# Altium PCB SIM800C.PcbDoc
Units mm, origin at the board's own origin, x right, y up, seen from the top; angles counter-clockwise.
Board outline 30.18 x 25.59 mm, 2 copper layers (TopLayer, BottomLayer); 27 components, 29 nets, 123 pads, 34 vias.
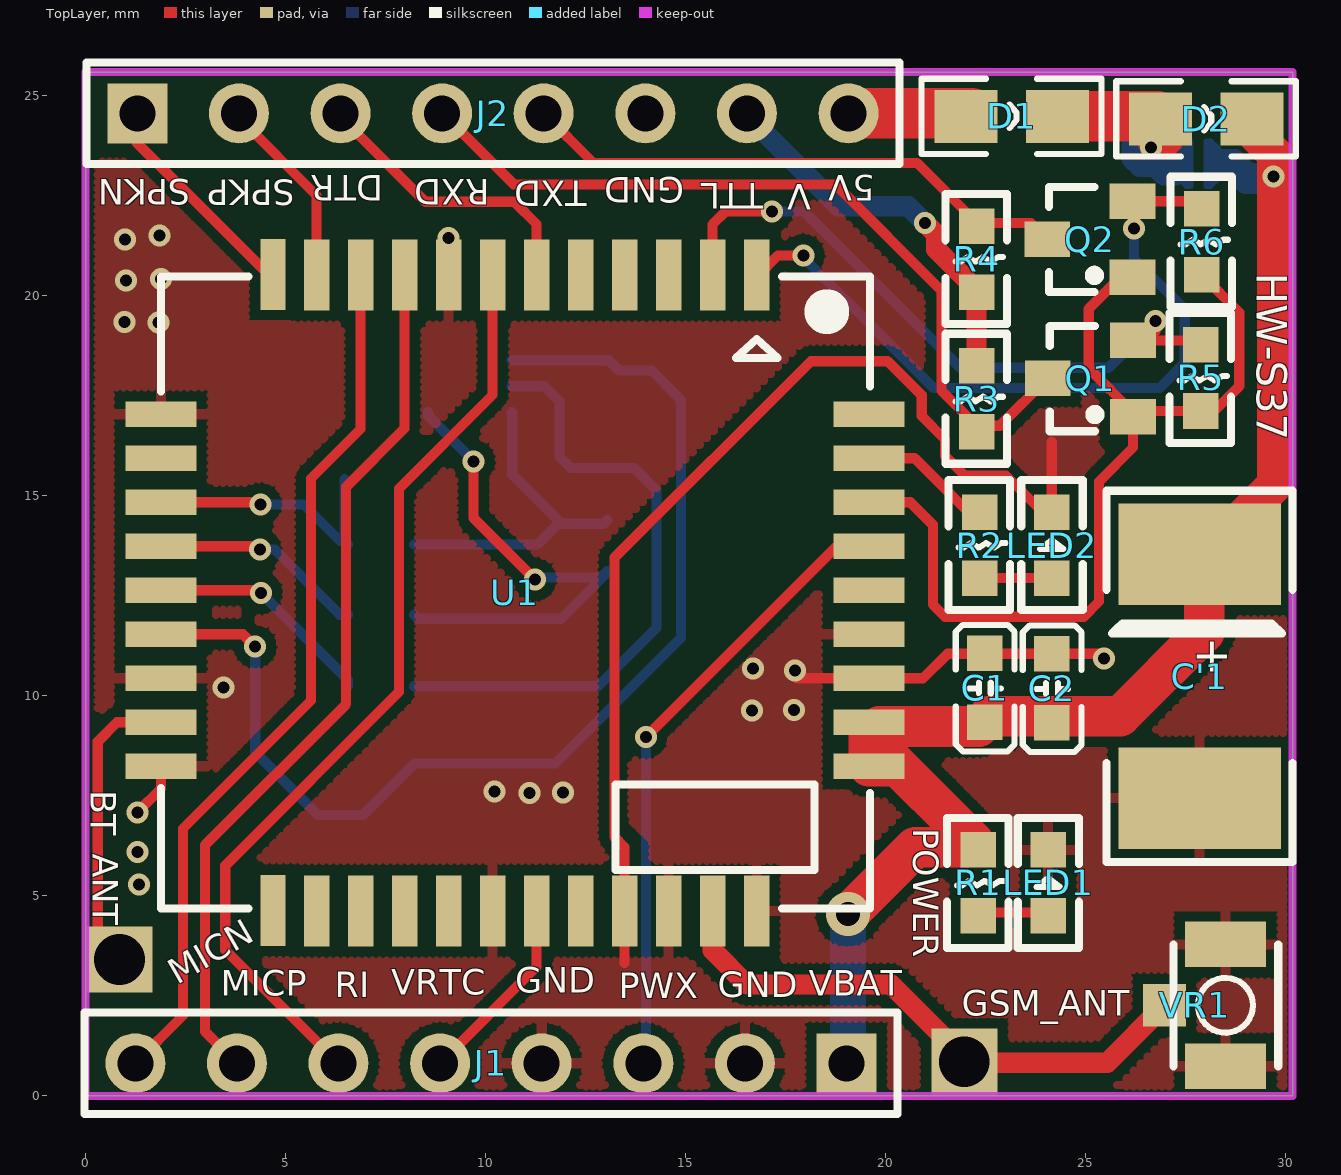
[diagram p0: TopLayer view]
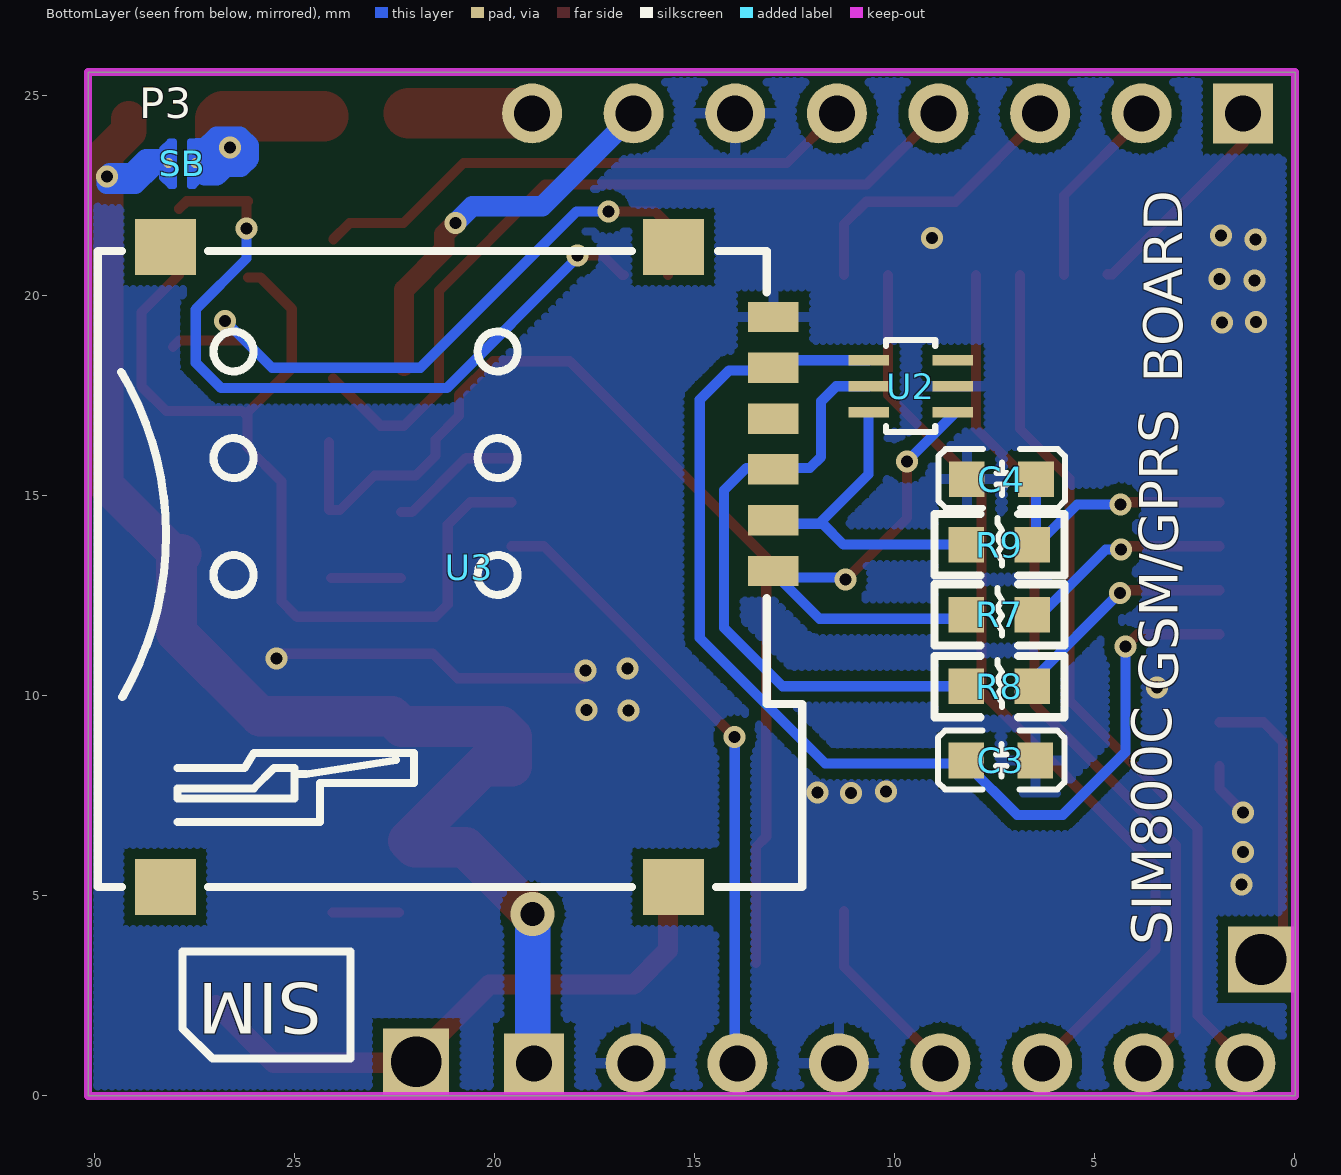
[diagram p1: BottomLayer view, seen from below]
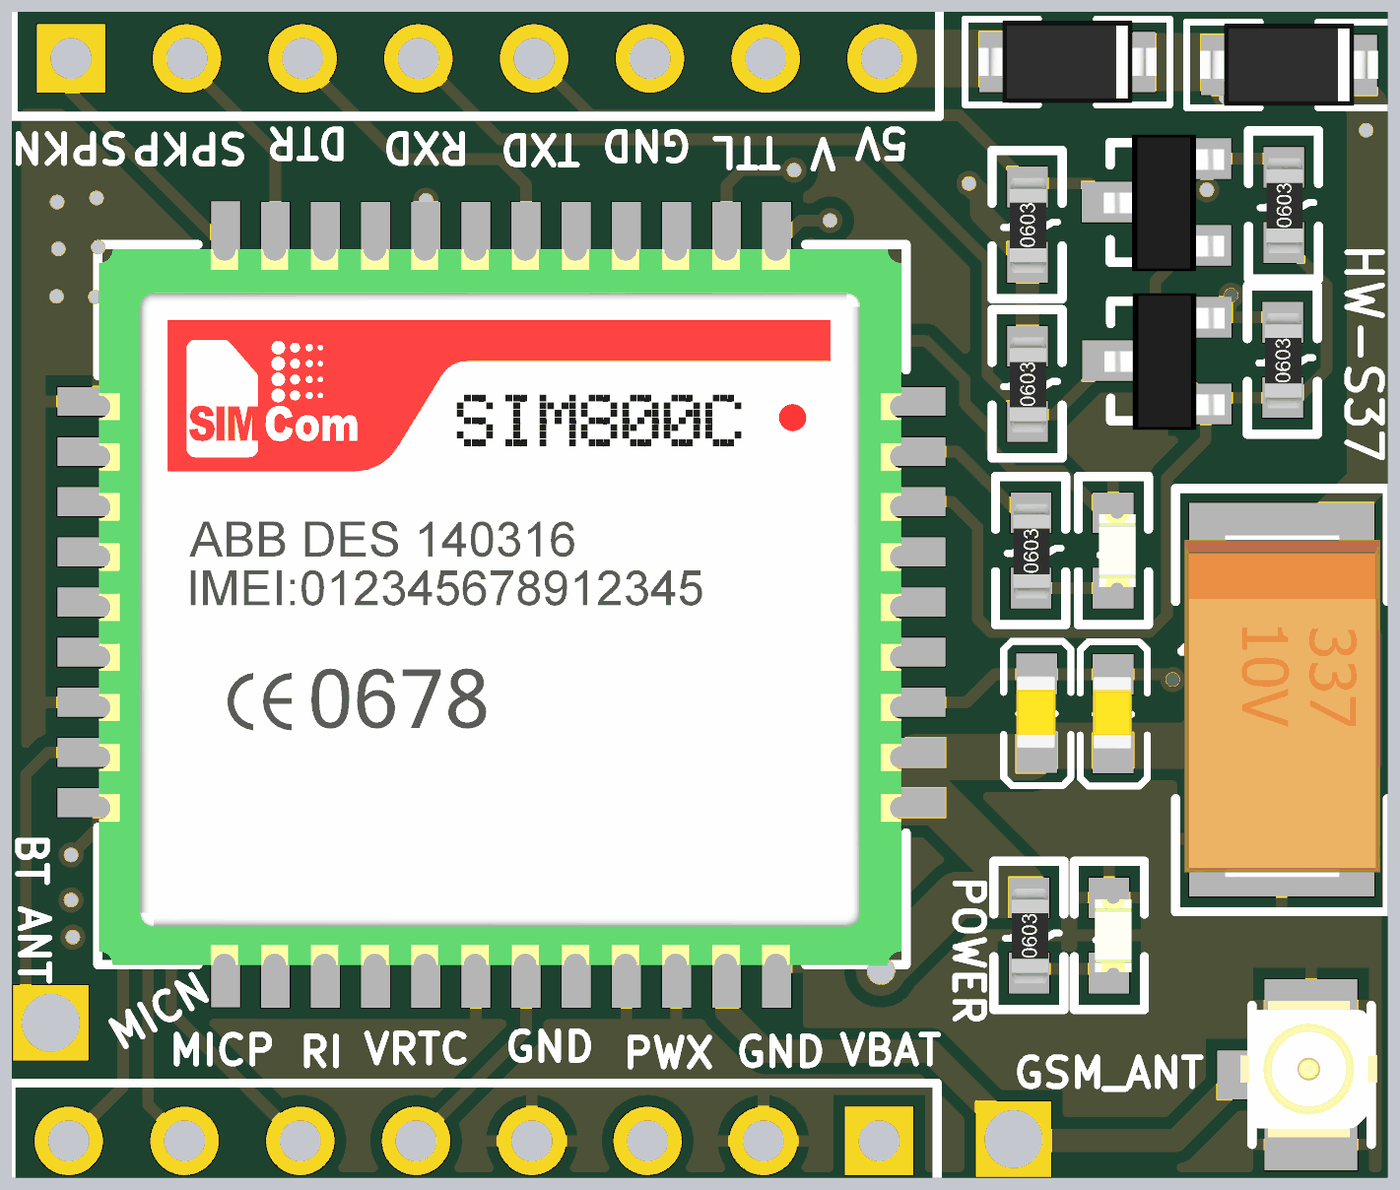
[diagram p2: 3D render of the assembled board from above, using the file's embedded part models]
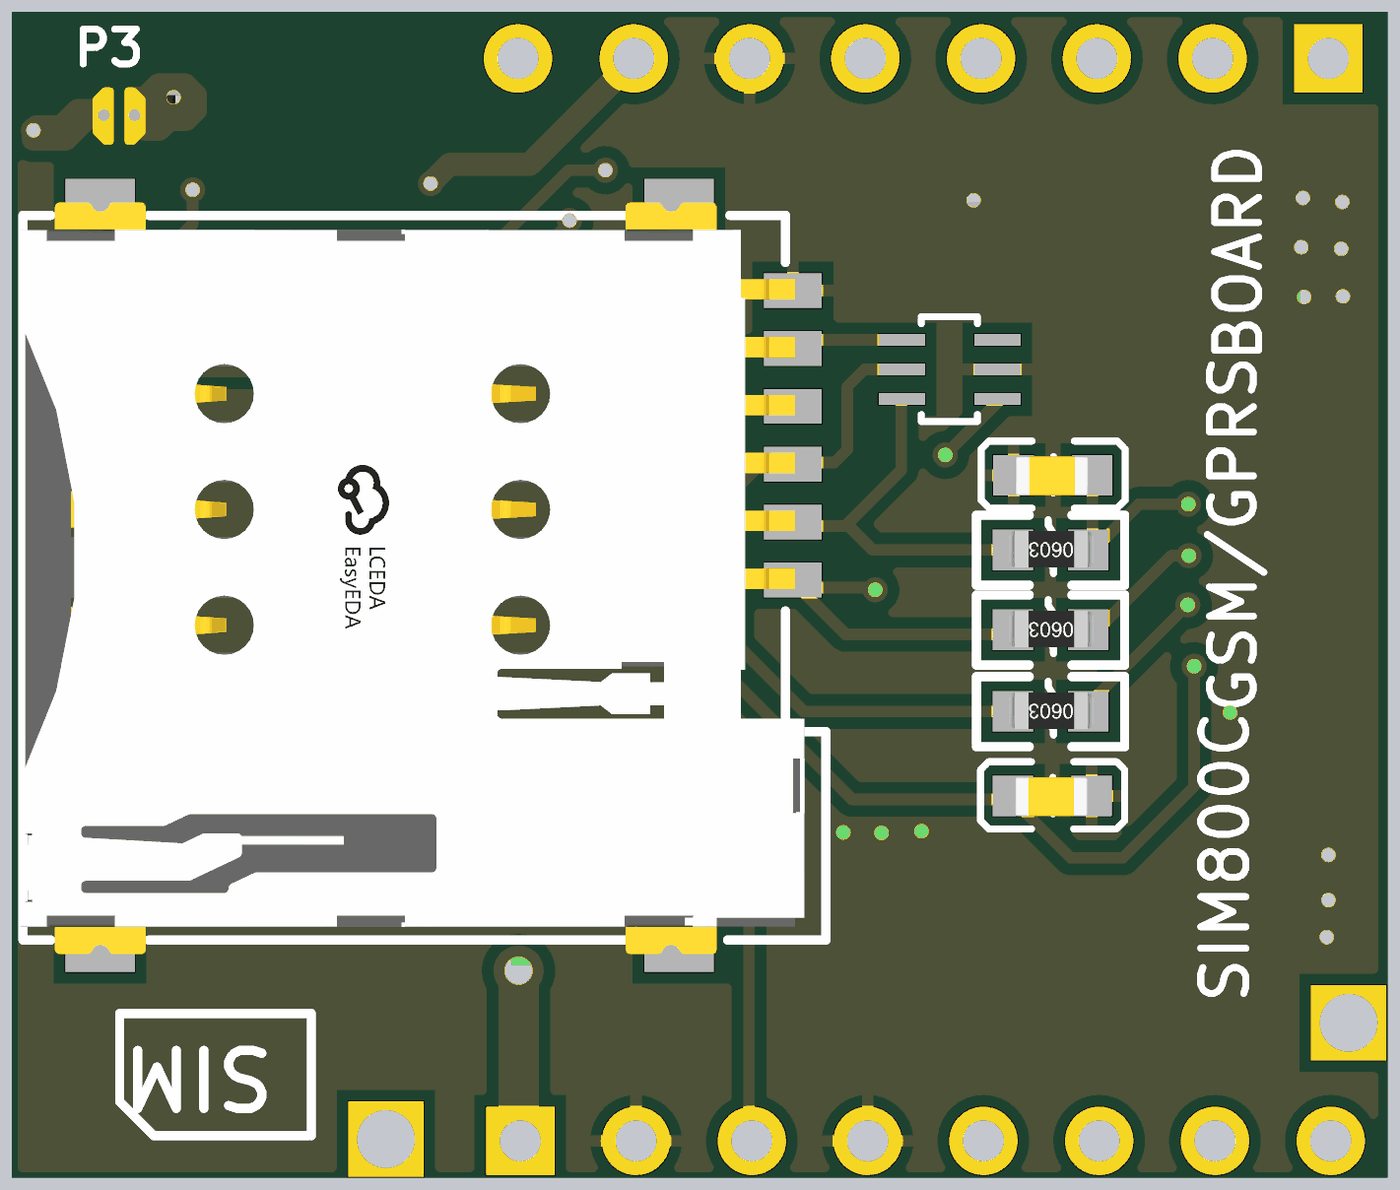
[diagram p3: 3D render of the assembled board from below, using the file's embedded part models]

## Layer stack, top to bottom
TopSolder: solder mask 0.0102, Solder Resist, Dk 3.5
TopLayer: signal copper 0.0356
Dielectric1: dielectric 0.32, FR-4, Dk 4.8
BottomLayer: signal copper 0.0356
BottomSolder: solder mask 0.0102, Solder Resist, Dk 3.5

## Board outline
-0.003,0.001 30.172,0.001 30.172,25.592 -0.003,25.592

## Design rules (kind name [scope] priority, off if disabled: settings)
Clearance Clearance_1 [(IsKeepOut)] p1: gap=0.025 ignorepadtopadclearanceinfootprint=FALSE
Clearance [All] p2: gap=0.254 ignorepadtopadclearanceinfootprint=FALSE
DiffPairsRouting [All] p1: maxlimit=0.254 minlimit=0.254 mostfreqgap=0.254 toplayer_minwidth=0.381 toplayer_maxwidth=0.381 toplayer_prefwidth=0.381 bottomlayer_minwidth=0.381 bottomlayer_maxwidth=0.381 bottomlayer_prefwidth=0.381 substack1={28ED7926-686F-4452-BE2E-54A0F4AF4EC6} toplayer_{28ed7926-686f-4452-be2e-54a0f4af4ec6}_minwidth=0.381 toplayer_{28ed7926-686f-4452-be2e-54a0f4af4ec6}_maxwidth=0.381 toplayer_{28ed7926-686f-4452-be2e-54a0f4af4ec6}_prefwidth=0.381 bottomlayer_{28ed7926-686f-4452-be2e-54a0f4af4ec6}_minwidth=0.381 bottomlayer_{28ed7926-686f-4452-be2e-54a0f4af4ec6}_maxwidth=0.381 bottomlayer_{28ed7926-686f-4452-be2e-54a0f4af4ec6}_prefwidth=0.381 maxuncoupledlength=12.7
FabricationTestPointUsage TestPointUsage [All] p1: valid=0 allowmultiple=FALSE
FabricationTestpoint Testpoint [All] p1: side=3 testpointundercomponent=TRUE minsize=1.016 maxsize=2.54 preferedsize=1.524 minholesize=0.508 maxholesize=1.016 preferedholesize=0.813 testpointgrid=0.025 allowsidetop=TRUE allowsidebottom=TRUE usegrid=TRUE gridtolerance=0
PolygonConnect [All] p1: thpad.connectstyle=Relief thpad.reliefconductorwidth=0.254 thpad.reliefentries=4 thpad.polygonreliefangle="90 Angle" thpad.airgapwidth=0.254 smdpad.connectstyle=Relief smdpad.reliefconductorwidth=0.254 smdpad.reliefentries=4 smdpad.polygonreliefangle="90 Angle" smdpad.airgapwidth=0.254 via.connectstyle=Direct via.reliefconductorwidth=0.254 via.reliefentries=4 via.polygonreliefangle="90 Angle" via.airgapwidth=0.254
RoutingVias [All] p1: holewidth=0.711 width=1.27 viastyle="Through Hole" minholewidth=0.711 minwidth=1.27 maxholewidth=0.711 maxwidth=1.27
SolderMaskExpansion [All] p1: expansion=0.025 istentingtop=FALSE
SupplyNets "Schematic Supply Nets_4" [InNet('VDD3.7V')] p1: voltage=0.000
SupplyNets "Schematic Supply Nets_3" [InNet('VDD5V')] p2: voltage=0.000
SupplyNets "Schematic Supply Nets_2" [InNet('GND')] p3: voltage=0.000
SupplyNets "Schematic Supply Nets_1" [InNet('VDD_EXT')] p4: voltage=0.000
SupplyNets "Schematic Supply Nets" [InNet('VTTL')] p5: voltage=0.000
Width [All] p1: maxlimit=0.254 minlimit=0.254 preferedwidth=0.254 substack1={28ED7926-686F-4452-BE2E-54A0F4AF4EC6}
27 further rules are at their usual default settings.

## Components (designator, comment, footprint, x,y, rotation, side; value= is the part's Value field where it differs from the comment)
C1 "10%" 0603C 22.476,9.336 r90 top
C2 "10%" 0603C 24.152,9.323 r90 top
C3 "10%" 0603C 6.486,8.383 r0 bottom
C4 "10%" 0603C 6.474,15.419 r0 bottom
C'1 "1000uF" D 27.848,13.539 r270 top
D1 "DIODE-DO214-AC" SOD123 22.006,24.487 r0 top
D2 "DIODE-DO214-AC" SOD123 26.87,24.423 r0 top
J1 "Header 8" HDR1X8 19.021,0.814 r180 top
J2 "Header 8" HDR1X8 1.292,24.563 r0 top
LED1 "LED" 0603LED 24.063,4.497 r270 top
LED2 "LED" 0603LED 24.152,12.942 r270 top
Q1 "BSS138" SOT23 26.184,16.981 r90 top
Q2 "BSS138" SOT23 26.171,20.461 r90 top
R1 "5%" 0603 22.31,4.497 r90 top
R2 "5%" 0603 22.349,12.942 r90 top
R3 "5%" 0603 22.272,16.6 r90 top
R4 "5%" 0603 22.272,20.092 r90 top
R5 "5%" 0603 27.873,17.121 r90 top
R6 "5%" 0603 27.898,20.524 r90 top
R7 "5%" 0603 6.562,12.028 r0 bottom
R8 "5%" 0603 6.562,10.237 r0 bottom
R9 "5%" 0603 6.562,13.781 r0 bottom
SB "SB" Jumper-NO 27.822,23.318 r0 bottom
U1 "SIM800C GSM/GPRS Module" SMD 16.773,20.524 r0 top
U2 "SOT363" SOT363 10.652,18.391 r0 bottom
U3 "SIM_LOCK" SMD-6 13.039,19.47 r180 bottom
VR1 "SMA Connector   90Â° DIP SMA Connector, 50 Ohm (4UConnector: 07259)" SMD-3 28.495,0.738 r0 top

## Footprints (in the part's own frame and the unit in brackets; to place one, negate y for a bottom-side part, rotate by r counter-clockwise, add the part's x,y. Pads: shape width x height; smd on the part's side, far side on the other; paste and mask are expansions set on the pad)
0603 [mil]
  rect 35x35 smd: 1(65,0) 2(0,0)
  silkscreen extent -32,-30 96,31, body extent -10,-16 73,15, height 20
0603C [mil]
  rect 35x35 smd: 1(0,0) 2(68,0)
  silkscreen extent -28,-30 96,29, body extent 3,-16 66,18, height 31
0603LED [mil]
  rect 35x35 smd: 1(0,0) 2(-65,0)
  silkscreen extent -96,-30 32,31, body extent -64,-12 -1,19, height 22
D [mil]
  rect 100x160 smd: 1(0,0) 2(240,0)
  silkscreen extent -63,-92 303,92, body extent -22,-84 273,85, height 110
HDR1X8 [mm] "Connector; Header; 8 Position"
  rect 1.5x1.5 hole 0.9: 1(0,0)
  round 1.5 hole 0.9: 2(2.54,0) 3(5.08,0) 4(7.62,0) 5(10.16,0) 6(12.7,0) 7(15.24,0) 8(17.78,0)
  silkscreen extent -1.27,-1.27 19.05,1.27
Jumper-NO [mil]
  round 10 smd: 1(13.25,0) 2(-13.25,0)
  TopLayer lines w6: -7.75,-12.5 -7.75,-16.5 -12.25,-21 ; 7.75,-12.5 7.75,-16.5 12.25,-21 ; -12.25,-21 -7.75,-21 -7.75,-6 -7.75,22.5 -11.75,22.5 -19.75,14.5 -19.75,-13.5 -12.25,-21 ; 12.25,-21 7.75,-21 7.75,-6 7.75,22.5 11.75,22.5 19.75,14.5 19.75,-13.5 12.25,-21 ; -18.25,12.5 -13.25,17.5 -13.25,-16 -18.25,-11 -18.25,12.5 ; 13.25,17.5 18.25,12.5 18.25,-11 13.25,-16 13.25,17.5
SMD [mil]
  rect 25x70 smd: 1(0,0) 2(-43.31,0) 3(-86.61,0) 4(-129.92,0) 5(-173.23,0) 6(-216.54,0) 7(-259.84,0) 8(-303.15,0) 9(-346.46,0) 10(-389.76,0) 11(-433.07,0) 12(-476,0.5) 22(-476,-625.48) 23(-433.07,-625.98) 24(-389.76,-625.98) 25(-346.46,-625.98) 26(-303.15,-625.98) 27(-259.84,-625.98) 28(-216.54,-625.98) 29(-173.23,-625.98) 30(-129.92,-625.98) 31(-86.61,-625.98) 32(-43.31,-625.98) 33(0,-625.98)
  rect 70x25 smd: 13(-586.24,-137.3) 14(-586.24,-180.6) 15(-586.24,-223.91) 16(-586.24,-267.22) 17(-586.24,-310.52) 18(-586.24,-353.83) 19(-586.24,-397.14) 20(-586.24,-440.44) 21(-586.24,-483.75) 34(110.61,-483.75) 35(110.61,-440.44) 36(110.61,-397.14) 37(110.61,-353.83) 38(110.61,-310.52) 39(110.61,-267.22) 40(110.61,-223.91) 41(110.61,-180.6) 42(110.61,-137.3)
  silkscreen extent -586,-624 112,-2, body extent -585,-624 108,-6, height 90
SMD-3 [mil]
  rect 80x45 smd: 1(0,0) 2(0,120)
  rect 42x42 smd: 3(-60,60)
  silkscreen extent -51,0 52,120, body extent -61,6 57,124, height 49
SMD-6 [mil]
  rect 50x30 smd: 1(0,-250) 2(0,-200) 3(0,-150) 4(0,-100) 5(0,-50) 6(0,0)
  rect 60x55 smd: 7(-98.43,-561.02) 8(-598.43,-561.02) 9(-598.43,68.9) 10(-98.43,68.9)
  silkscreen extent -665,-561 28,65, body extent -667,-573 10,76, height 50
SOD123 [mil]
  rect 62x52 smd: 1(0,0) 2(90,0)
  silkscreen extent -44,-37 134,37, body extent -32,-35 122,35, height 46
SOT23 [mil]
  rect 35x45 smd: 1(0,0) 2(75,0) 3(37.5,84)
  silkscreen extent -15,33 89,82, body extent -22,-16 96,88, height 43
SOT363 [mil]
  rect 40x10 smd: 1(0,0) 2(0,25.59) 3(0,51.18) 4(-82.68,51.18) 5(-82.68,25.59) 6(-82.68,0)
  silkscreen extent -65,-20 -17,71

## Part data
C1 C2 C3 C4: library part CAP0603_NPOL, "Chip capacitor"
C'1: library part Taltium
J1 J2: "Header, 8-Pin", LatestRevisionDate=17-Jul-2002, LatestRevisionNote="Re-released for DXP Platform.", Publisher="Altium Limited"
LED1 LED2: library part LEDCHIP-LED0603, "SMD lamp beads"
Q1 Q2: "N Channel Mosfet"
R1 R2 R3 R4 R5 R6 R7 R8 R9: library part RESISTOR, "Chip Resistor", AEMS Code=1200430
SB: "RESISTOR, American symbol"
U1: library part GSM_SIM800C, Package=SIM900_SMT, DeviceName=SIM800C, DeviceSetName=GSM_SIM900_LITERAL, GateName_1=G$1, LibraryName=microbuilder, SymbolName_1=SIM900_LITERAL
U2: library part SMF05C, DeviceSetName=TVSARRAY_5LANE, GateName_1=G$1, LibraryName=microbuilder, Package=SOT363, SymbolName_1=TVSARRAY_5LANE
U3: Package=SIM_5002, DeviceSetName=SIM_LOCK, GateName_1=G$1, LibraryName=microbuilder, SymbolName_1=SIMLOCK-6
VR1: library part PatchAntenna

## Free pads (board coordinates)
  rect 1.651x1.651 hole 1.27: 1(21.968,0.852) 2(0.847,3.405)

## Via types
v1: diameter 0.55, hole 0.3, TopLayer to BottomLayer, tented both sides, 33 vias
v2: diameter 1.1, hole 0.6, TopLayer to BottomLayer, tented both sides, 1 vias

## Nets (pads, with @x,y where several pads share a name; then routed paths per layer and width w, separated by ;. In a path a pad name is that pad's centre, name@x,y a point inside that pad or via, vN(x,y) a via of type N, cw(c..) or ccw(c..) an arc to the next point about the centre after c; other vN are vias at no path point)
G.RXD: Q1.2 R5.1 U1.2 | length 17.1
  TopLayer w0.254: U1.2 15.673,21.786 15.999,22.112 v1(17.154,22.112) ; Q1.2 27.886,18.886 R5.1@28.051,18.721 ; Q1.2@26.514,18.886 26.743,19.115 v1(26.743,19.369)
  BottomLayer w0.254: v1(17.154,22.112) 17.954,22.112 21.866,18.2 25.574,18.2 v1(26.743,19.369)
G.TXD: Q2.2 R6.1 U1.1 | length 19
  TopLayer w0.254: U1.1 16.824,20.524 17.307,21.007 v1(17.942,21.007) ; v1(26.209,21.68) 26.209,22.328 Q2.2 27.708,22.366 R6.1
  BottomLayer w0.254: v1(17.942,21.007) 17.942,20.956 21.206,17.692 26.844,17.692 27.479,18.327 27.479,19.661 26.209,20.931 v1(26.209,21.68)
G_ANT: pad.1 U1.32 VR1.3 | length 14
  TopLayer w0.508: U1.32 15.673,3.641 16.532,2.782 20.139,2.782 22.095,0.827 25.536,0.827 VR1.3
GND: C1.2 C2.2 C3.1 C4.2 C'1.2 J1.2 J1.4 J2.6 LED1.2 LED2.2 U1.8 U1.13 U1.19 U1.21 U1.27 U1.30 U1.31 U1.33 U1.36 U1.37 U2.5 U3.6 VR1.1 VR1.2 | length 36.4
  TopLayer w0.254: v1(1.292,7.088) 1.883,7.679 U1.21 ; 13.473,3.318 U1.30 13.473,6.222 13.217,6.478 13.217,13.45 18.132,18.365 20.05,18.365 20.901,17.514 20.901,16.994 21.485,16.409 21.485,16.003 21.98,15.508 23.009,15.508 23.873,14.644 24.152,14.644 24.152,16.346 ; v1@17.786,10.437 U1.36 20.935,10.437 21.548,11.05 25.346,11.05 v1(25.46,10.936)
  other v1: 1.33,5.284 1.292,6.097 11.096,7.57 11.935,7.583 10.22,7.608 16.659,9.628 17.713,9.64 3.451,10.212 17.738,10.631 16.684,10.682 0.974,19.343 1.825,19.33 1.013,20.385 1.889,20.423 0.987,21.413 9.077,21.451 1.851,21.502
NetC4_1: C4.1 R9.2 U1.15 | length 6.7
  TopLayer w0.254: U1.15 4.312,14.837 v1(4.365,14.784)
  BottomLayer w0.254: v1(4.365,14.784) 5.445,14.784 6.359,13.869 R9.2@6.474,13.869 ; C4.1 R9.2@6.474,13.869 ; R9.2 R9.2@6.474,13.869
NetD1_2: D1.2 D2.1 SB.2 | length 8.4
  TopLayer w1.27: D1.2 26.794,24.487 26.857,24.423 D2.1@26.857,24.055
  BottomLayer w0.508: 27.048,23.648 26.4,23.648 26.641,23.407 SB.2@27.441,23.407 ; 27.441,23.458 27.441,23.204 27.251,23.013 26.946,23.013 26.73,23.229 26.349,23.229 26.146,23.433 26.146,23.75 26.374,23.979 26.959,23.979 27.251,23.687 27.441,23.687
  other v1: 26.628,23.712
NetLED1_1: LED1.1 R1.2 | length 1.7
  TopLayer w0.254: R1.2@22.399,4.586 LED1.1@24.063,4.586
NetLED2_1: LED2.1 R2.2 | length 1.8
  TopLayer w0.254: R2.2 LED2.1@24.101,12.942
NetR2_1: R2.1 U1.41 | length 3.3
  TopLayer w0.254: U1.41 20.726,15.937 22.069,14.593 R2.1
NetR7_2: R7.2 U1.16 | length 5.4
  TopLayer w0.254: U1.16 4.269,13.737 v1(4.353,13.654)
  BottomLayer w0.254: v1(4.353,13.654) 4.734,13.654 R7.2@6.347,12.041 ; R7.2@6.347,12.028 R7.2
NetR8_2: R8.2 U1.17 | length 5.8
  TopLayer w0.254: U1.17 4.315,12.637 v1(4.378,12.574)
  BottomLayer w0.254: v1(4.378,12.574) 6.562,10.39 R8.2
P.06: J2.3 U1.6 | length 7.3
  TopLayer w0.254: J2.3@6.385,24.461 8.493,22.353 8.582,22.353 10.715,22.353 11.273,21.795 U1.6
P.07: J1.6 U1.7 | length 23.7
  TopLayer w0.254: J1.6 3.489,3.646 3.489,5.754 7.832,10.098 7.832,15.178 10.173,17.518 U1.7
P.09: J1.7 U1.9 | length 22.1
  TopLayer w0.254: J1.7 2.981,1.614 2.981,6.262 6.512,9.793 6.512,15.228 7.973,16.69 U1.9
P.10: J1.8 U1.10 | length 22
  TopLayer w0.254: J1.8 2.435,2.008 2.435,6.681 5.635,9.882 5.635,15.432 6.873,16.669 U1.10
P.11: J2.2 U1.11 | length 4.8
  TopLayer w0.254: J2.2 3.832,24.449 5.773,22.507 U1.11
P.12: J2.1 U1.12 | length 5.5
  TopLayer w0.254: J2.1 1.292,23.814 4.569,20.537 U1.12
P.28: J1.5 U1.28 | length 4.8
  TopLayer w0.254: J1.5 11.273,3.226 U1.28
PWRKEY: J1.3 U1.39 | length 15.9
  TopLayer w0.254: v1(14.005,8.967) 18.774,13.737 U1.39
  BottomLayer w0.254: J1.3@14.005,0.623 v1(14.005,8.967)
RXD: J2.4 Q1.3 R3.2 | length 20.3
  TopLayer w0.254: J2.4 8.925,24.563 10.703,22.785 18.742,22.785 21.396,20.131 21.396,17.629 22.272,16.752 22.857,16.752 24.038,17.933 Q1.3
simCLK: R7.1 U2.4 U3.1 | length 12.6
  TopLayer w0.254: v1(9.699,15.863) 9.699,14.441 v1(11.236,12.904)
  BottomLayer w0.254: R7.1 8.315,11.926 11.884,11.926 13.039,13.082 U3.1 12.874,12.955 11.287,12.955 v1(11.236,12.904) ; U2.4 8.552,17.011 v1(9.699,15.863)
simData: R9.1 U2.3 U3.2 | length 8.9
  BottomLayer w0.254: R9.1 11.287,13.781 11.808,14.301 12.392,14.301 ; U2.3 10.665,17.078 10.665,15.533 11.896,14.301 12.951,14.301 U3.2
simRST: R8.1 U2.2 U3.3 | length 15.6
  BottomLayer w0.254: R8.1 12.811,10.237 14.271,11.698 14.271,15.139 13.713,15.698 12.125,15.698 11.846,15.978 11.846,17.362 11.467,17.741 U2.2
simVcc: C3.2 U1.18 U2.1 U3.5 | length 28.8
  TopLayer w0.254: U1.18 3.929,11.537 v1(4.238,11.228)
  BottomLayer w0.254: v1(4.238,11.228) 4.238,8.586 5.8,7.024 6.943,7.024 8.226,8.307 11.744,8.307 14.881,11.444 14.881,17.4 14.144,18.137 13.332,18.137 13.078,18.391 U2.1
TXD: J2.5 Q2.3 R4.1 | length 13.9
  TopLayer w0.254: J2.5 12.697,23.318 20.786,23.318 22.285,21.82 23.631,21.82 Q2.3
VDD3.7V: C1.1 C2.1 C'1.1 D2.2 J1.1 R1.1 SB.1 U1.34 U1.35 | length 38.8
  TopLayer w0.889: C'1.1 27.987,13.539 29.727,15.279 29.727,23.547 29.156,24.118 D2.2
  TopLayer w1.016: v2@19.148,4.624 20.736,6.211 22.006,6.211 22.171,6.376 19.936,8.612 19.936,8.967 ; U1.34@20.107,8.237 U1.34 19.583,8.97 19.847,9.234 22.323,9.234 22.577,9.488 25.866,9.488 27.962,11.583 27.962,13.425 C'1.1
  BottomLayer w0.508: 28.406,23.42 28.724,23.42 29.08,23.064 29.626,23.064 v1(29.702,22.988) 29.702,22.798 28.991,22.798 28.584,23.204 28.584,23.267
  BottomLayer w0.889: J1.1@19.059,0.725 v2(19.059,4.548)
VDD5V: D1.1 J2.8 | length 3.1
  TopLayer w1.27: J2.8 D1.1@22.145,24.563
VDD_EXT: Q1.1 Q2.1 R5.2 R6.2 U1.40 | length 23.9
  TopLayer w0.254: U1.40 20.619,14.837 21.18,14.276 21.18,12.282 21.485,11.977 24.952,11.977 25.333,12.358 25.333,15.355 26.184,16.206 Q1.1 ; Q2.1 25.866,20.461 25.079,19.673 25.079,18.187 26.184,17.083 Q1.1 ; R6.2 28.838,19.584 28.838,17.743 28.216,17.121 R5.2 26.324,17.121 Q1.1
VTTL: J2.7 R3.1 R4.2 | length 9.7
  TopLayer w0.508: v1(20.99,21.82) 21.269,21.54 21.269,21.159 22.272,20.156 R3.1
  BottomLayer w0.508: J2.7@16.532,24.525 18.818,22.239 20.571,22.239 v1(20.99,21.82)
pads on no net: U1.3 U1.4 U1.5 U1.14 U1.20 U1.22 U1.23 U1.24 U1.25 U1.26 U1.29 U1.38 U1.42 U2.6 U3.4 U3.7 U3.8 U3.9 U3.10
copper on no net: | length 7.4
  TopLayer w0.254: 0.847,3.506 0.301,4.052 0.301,8.853 0.785,9.337 1.883,9.337

## Polygon pours and split planes (outlines as drawn)
GND on BottomLayer "BottomLayer-GND" (hatched 90Degree grid 0.178 track 0.203, remove dead copper, pour order 5): 28.876,2.135 28.876,0.179 0.301,0.179 0.301,25.49 30.045,25.49 30.045,0.179 28.889,0.179
GND on TopLayer "TopLayer-GND" (hatched 90Degree grid 0.178 track 0.203, remove dead copper, pour order 9): 24.774,18.213 24.207,17.645 23.25,17.645 23.034,17.413 23.034,16.155 23.86,15.33 24.825,15.33 25.104,15.051 25.104,14.878 25.168,14.941 25.168,15.355 cw(c25.333,15.355) 25.216,15.472 26.095,16.351 26.095,17.324 25.663,17.324
GND on TopLayer "TopLayer-GND" (hatched 90Degree grid 0.178 track 0.203, remove dead copper, pour order 8): 3.426,0.166 8.62,0.166 8.62,0.725 cw(c8.785,0.725) 8.668,0.842 11.108,3.282 11.108,4.624 cw(c11.273,4.624) 11.273,4.789 13.308,4.789 13.308,6.154 13.101,6.361 cw(c13.217,6.478) 13.052,6.478 13.052,13.45 cw(c13.217,13.45) 13.101,13.567 18.015,18.482 cw(c18.132,18.365) 18.132,18.53 20.05,18.53 cw(c20.05,18.365) 20.167,18.482 20.901,17.748 21.231,18.078 21.231,20.062 17.937,23.356 17.313,23.356 17.313,19.545 17.206,19.439 7.972,19.439 7.972,16.956 8.48,16.448 8.903,16.448 9.003,16.348 7.832,15.178 7.832,10.06 3.426,5.653
GND on TopLayer "TopLayer-GND" (hatched 90Degree grid 0.178 track 0.203, remove dead copper, pour order 7): 0.301,7.875 3.395,7.875 5.47,9.95 5.47,15.432 cw(c5.635,15.432) 5.519,15.548 6.677,16.706 6.677,19.439 4.194,19.439 4.194,20.34 1.178,23.356 0.301,23.356
GND on TopLayer "TopLayer-GND" (hatched 90Degree grid 0.178 track 0.203, remove dead copper, pour order 6): 13.638,6.882 14.157,6.364 14.157,3.557 11.49,3.557 11.438,3.582 11.438,3.213 cw(c11.273,3.213) 11.39,3.097 8.95,0.657 8.95,0.166 28.178,0.166 28.178,2.312 28.267,0.153 29.981,0.153 29.981,12.384 28.584,12.384 25.498,9.297 20.482,9.297 20.482,11.901 18.831,13.552 18.589,13.552 13.638,8.601

## Keep-outs
KeepOutLayer:
  the board outline again, w0.2

## Silkscreen, mask and mechanical layers (free items; w line width, h text height)
TopOverlay:
  text "DTR" at 7.439,23.013 h0.64 r180
  text "5V" at 19.732,23.013 h0.64 r180
  text "GND" at 14.97,22.963 h0.64 r180
  text "SPKN" at 2.613,22.912 h0.64 r180
  text "SPKP" at 5.229,22.899 h0.64 r180
  text "RXD" at 10.106,22.912 h0.64 r180
  text "TXD" at 12.531,22.874 h0.64 r180
  text "TTL" at 16.938,22.81 h0.64 r180
  text "V" at 18.145,22.785 h0.64 r180
  text "HW-S37" at 29.283,20.575 h0.76 r270
  text "BT" at 0.124,7.634 h0.64 r270
  text "POWER" at 20.685,6.694 h0.64 r270
  text "ANT" at 0.174,6.046 h0.64 r270
  text "MICN" at 2.295,2.77 h0.64 r30
  text "GND" at 10.741,2.579 h0.64
  text "VRTC" at 7.642,2.528 h0.64
  text "MICP" at 3.375,2.503 h0.64
  text "VBAT" at 18.081,2.503 h0.64
  text "RI" at 6.232,2.465 h0.64
  text "GND" at 15.808,2.465 h0.64
  text "PWX" at 13.332,2.439 h0.64
  text "GSM_ANT" at 21.904,2.008 h0.64
BottomOverlay:
  lines w0.203: 23.606,0.928 23.606,2.338 23.606,3.608 27.81,3.608 27.81,1.677 27.06,0.928 23.606,0.928
  text "P3" at 28.889,24.436 h0.76
  text "BOARD" at 2.816,17.832 h0.97 r270
  text "GSM/GPRS" at 2.93,10.11 h0.97 r270
  text "SIM800C" at 3.095,3.76 h0.99 r270
  text "SIM" at 24.317,2.808 h1.27 r180
Mechanical1:
  lines w0.127: -0.308,-0.266 30.781,-0.266 30.781,26.214 -0.308,26.214 -0.308,-0.266

## Text inside footprints (layer, text, board x,y; h text height)
C'1: TopOverlay "+" at 27.657,10.606 h0.89